# EAGLE board Blinky_v1 (EAGLE 7.7.0)
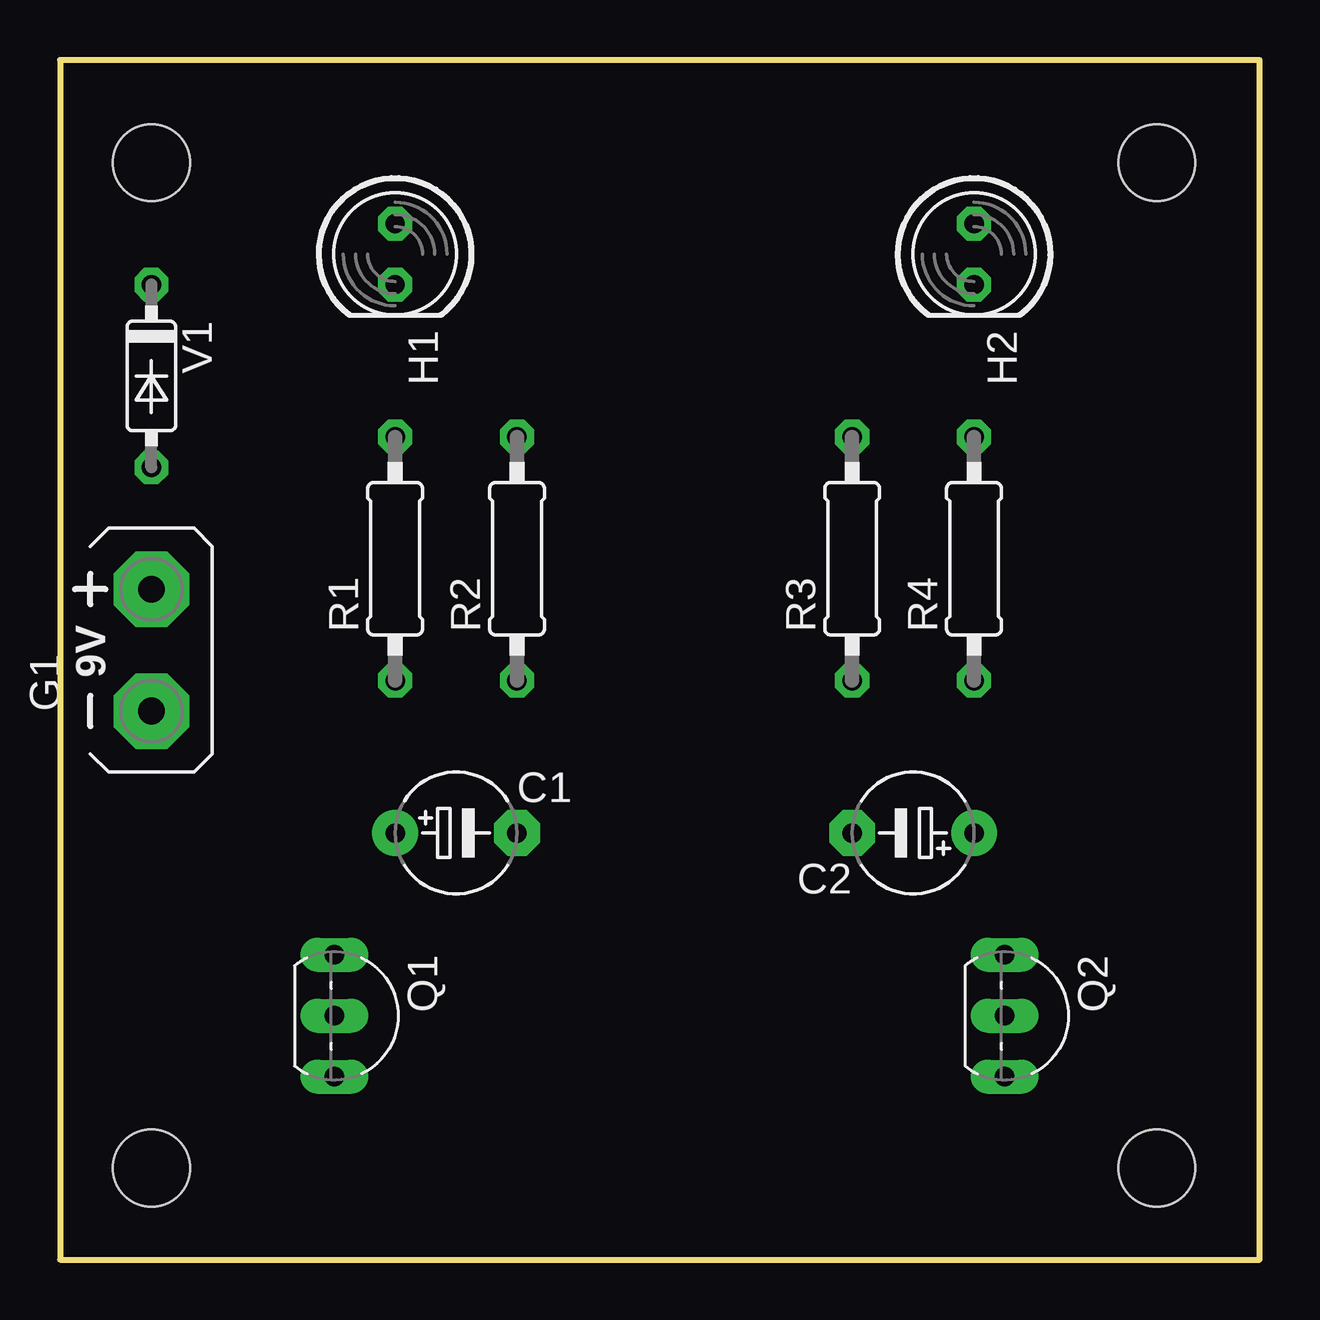
[diagram p0: board, top side]
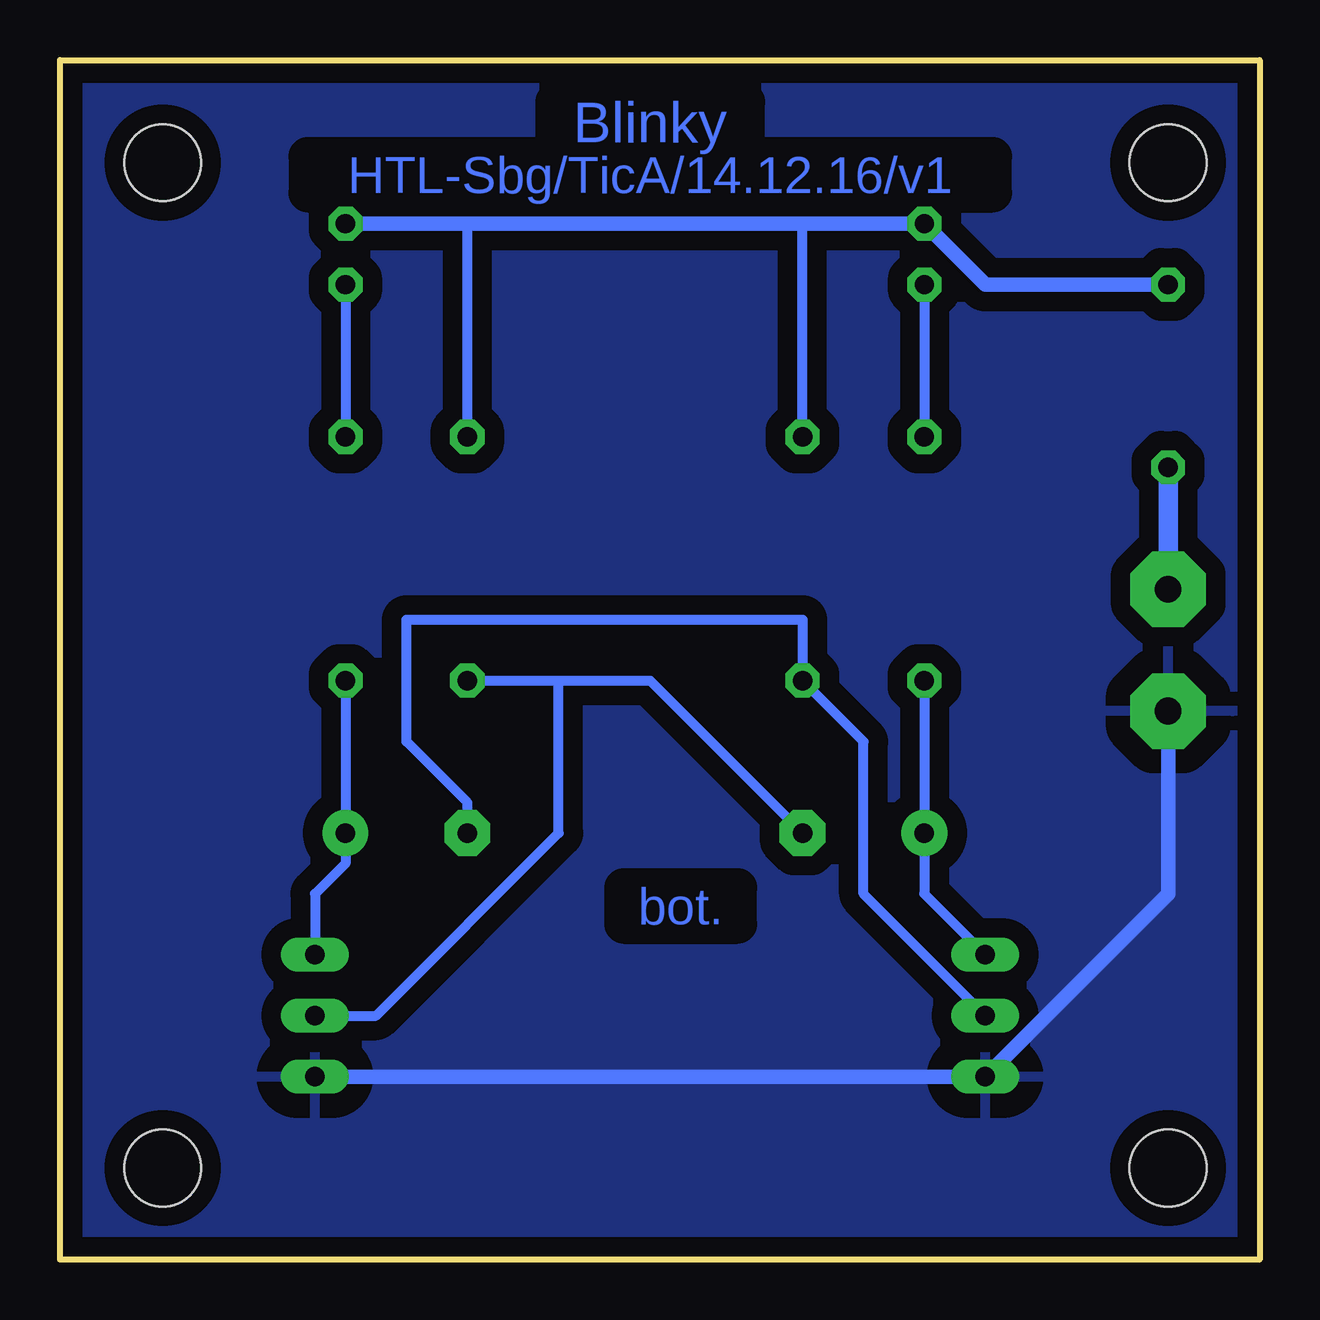
[diagram p1: board, bottom side, seen from below]

Size 50 x 50 mm. Coordinates in mm from the lower left corner, seen from the top.
Outline: 0,0 50,0 50,50 0,50 0,0
Copper layers (1+16): Top 0.035559375mm / dielectric 1.501140625mm / Bottom 0.035559375mm
Design rules "2HN": minimum track width 16mil, minimum drill 0.599440625mm, track to track 10mil, track to pad 8mil, pad to pad 8mil, via to via 8mil, smd to smd 8mil, copper to edge 20mil, drill to drill 8mil, minimum pad ring 12mil, minimum via ring 13mil, stop-mask expansion 4mil, vias tented up to drill 0mil, thermal gap 40mil
Holes 3.2 mm at 3.81,3.81 45.72,3.81 45.72,45.72 3.81,45.72

## Footprints (pad centres in the part's own frame; a part is rotated, then mirrored left to right if it is on the bottom)
E5-5 = drill 0.813 pad 1.905: + -2.54,0 | drill 0.813 pad 1.905 octagon: - 2.54,0
AB9V = drill 1.118 pad 3.15 octagon: + 0,2.54; - 0,-2.54
LED5MM = drill 0.8 octagon: A -1.27,0; K 1.27,0
TO92-EBC = drill 0.813 long: B 0,-1.27; C -2.54,-1.27; E 2.54,-1.27
0207/10 = drill 0.813 octagon: 1 -5.08,0; 2 5.08,0
DO35-7 = drill 0.8 octagon: A 3.81,0; C -3.81,0

## Placement (x,y rotation side)
C1  22u  [E5-5]  16.51,17.78 0 top
C2  22u  [E5-5]  35.56,17.78 180 top
G1  AB9V9V  [AB9V]  3.81,25.4 0 top
H1  Rt  [LED5MM]  13.97,41.91 270 top
H2  Gn  [LED5MM]  38.1,41.91 270 top
Q1  BC546B  [TO92-EBC]  12.7,10.16 270 top
Q2  BC546B  [TO92-EBC]  40.64,10.16 270 top
R1  330R  [0207/10]  13.97,29.21 90 top
R2  4k7  [0207/10]  19.05,29.21 90 top
R3  4k7  [0207/10]  33.02,29.21 90 top
R4  330R  [0207/10]  38.1,29.21 90 top
V1  1N4148  [DO35-7]  3.81,36.83 270 top

## Library data of the parts
C1 C2 R1-R4 = rcl_TicA
G1 = Battery_TicA
H1 H2 = led_TicA
Q1 Q2 = transistor_TicA
V1 = diode_TicA

## Nets
+9V: G1.+ V1.A
GND: G1.- Q1.E Q2.E
N$2: H1.A H2.A R2.2 R3.2 V1.C
N$3: H2.K R4.2
N$4: H1.K R1.2
N$5: C1.+ Q1.C R1.1
N$7: C2.- Q1.B R2.1
N$8: C2.+ Q2.C R4.1
N$10: C1.- Q2.B R3.1

## Tracks (layer width: path | path; a pad name or v marks a point on that pad's centre or on a via)
+9V
  Bottom 0.813: G1.+ V1.A
GND
  Bottom 0.61: Q2.E Q1.E 3.81,15.24 G1.-
  pour Bottom (isolate 0.813): 0,0 50.8,0 50.8,50.8 0,50.8 0,49.53
N$2
  Bottom 0.406: R2.2 19.05,43.18 | R3.2 33.02,43.18
  Bottom 0.61: V1.C 11.43,40.64 H1.A 19.05,43.18 33.02,43.18 H2.A
N$3
  Bottom 0.406: H2.K R4.2
N$4
  Bottom 0.406: H1.K R1.2
N$5
  Bottom 0.406: R1.1 C1.+ 13.97,15.24 Q1.C
N$7
  Bottom 0.406: Q1.B 16.51,15.24 16.51,21.59 R2.1 19.05,26.67 35.56,26.67 35.56,21.59 33.02,19.05 C2.-
N$8
  Bottom 0.406: R4.1 C2.+ 38.1,16.51 39.37,15.24 Q2.C
N$10
  Bottom 0.406: R3.1 29.21,24.13 | 29.21,24.13 25.4,24.13 C1.- | Q2.B 36.83,10.16 29.21,17.78 29.21,24.13

## Text on the board
Bottom: Blinky | HTL-Sbg/TicA/14.12.16/v1 | bot.